# Altium PCB level_converter.PcbDoc
Units mm, origin at the board's own origin, x right, y up, seen from the top; angles counter-clockwise.
Board outline 200.41 x 199.96 mm, 2 copper layers (Top Layer, Bottom Layer); 20 components, 15 nets, 62 pads, 0 vias.
Unrouted connection lines stored in the file: 43.
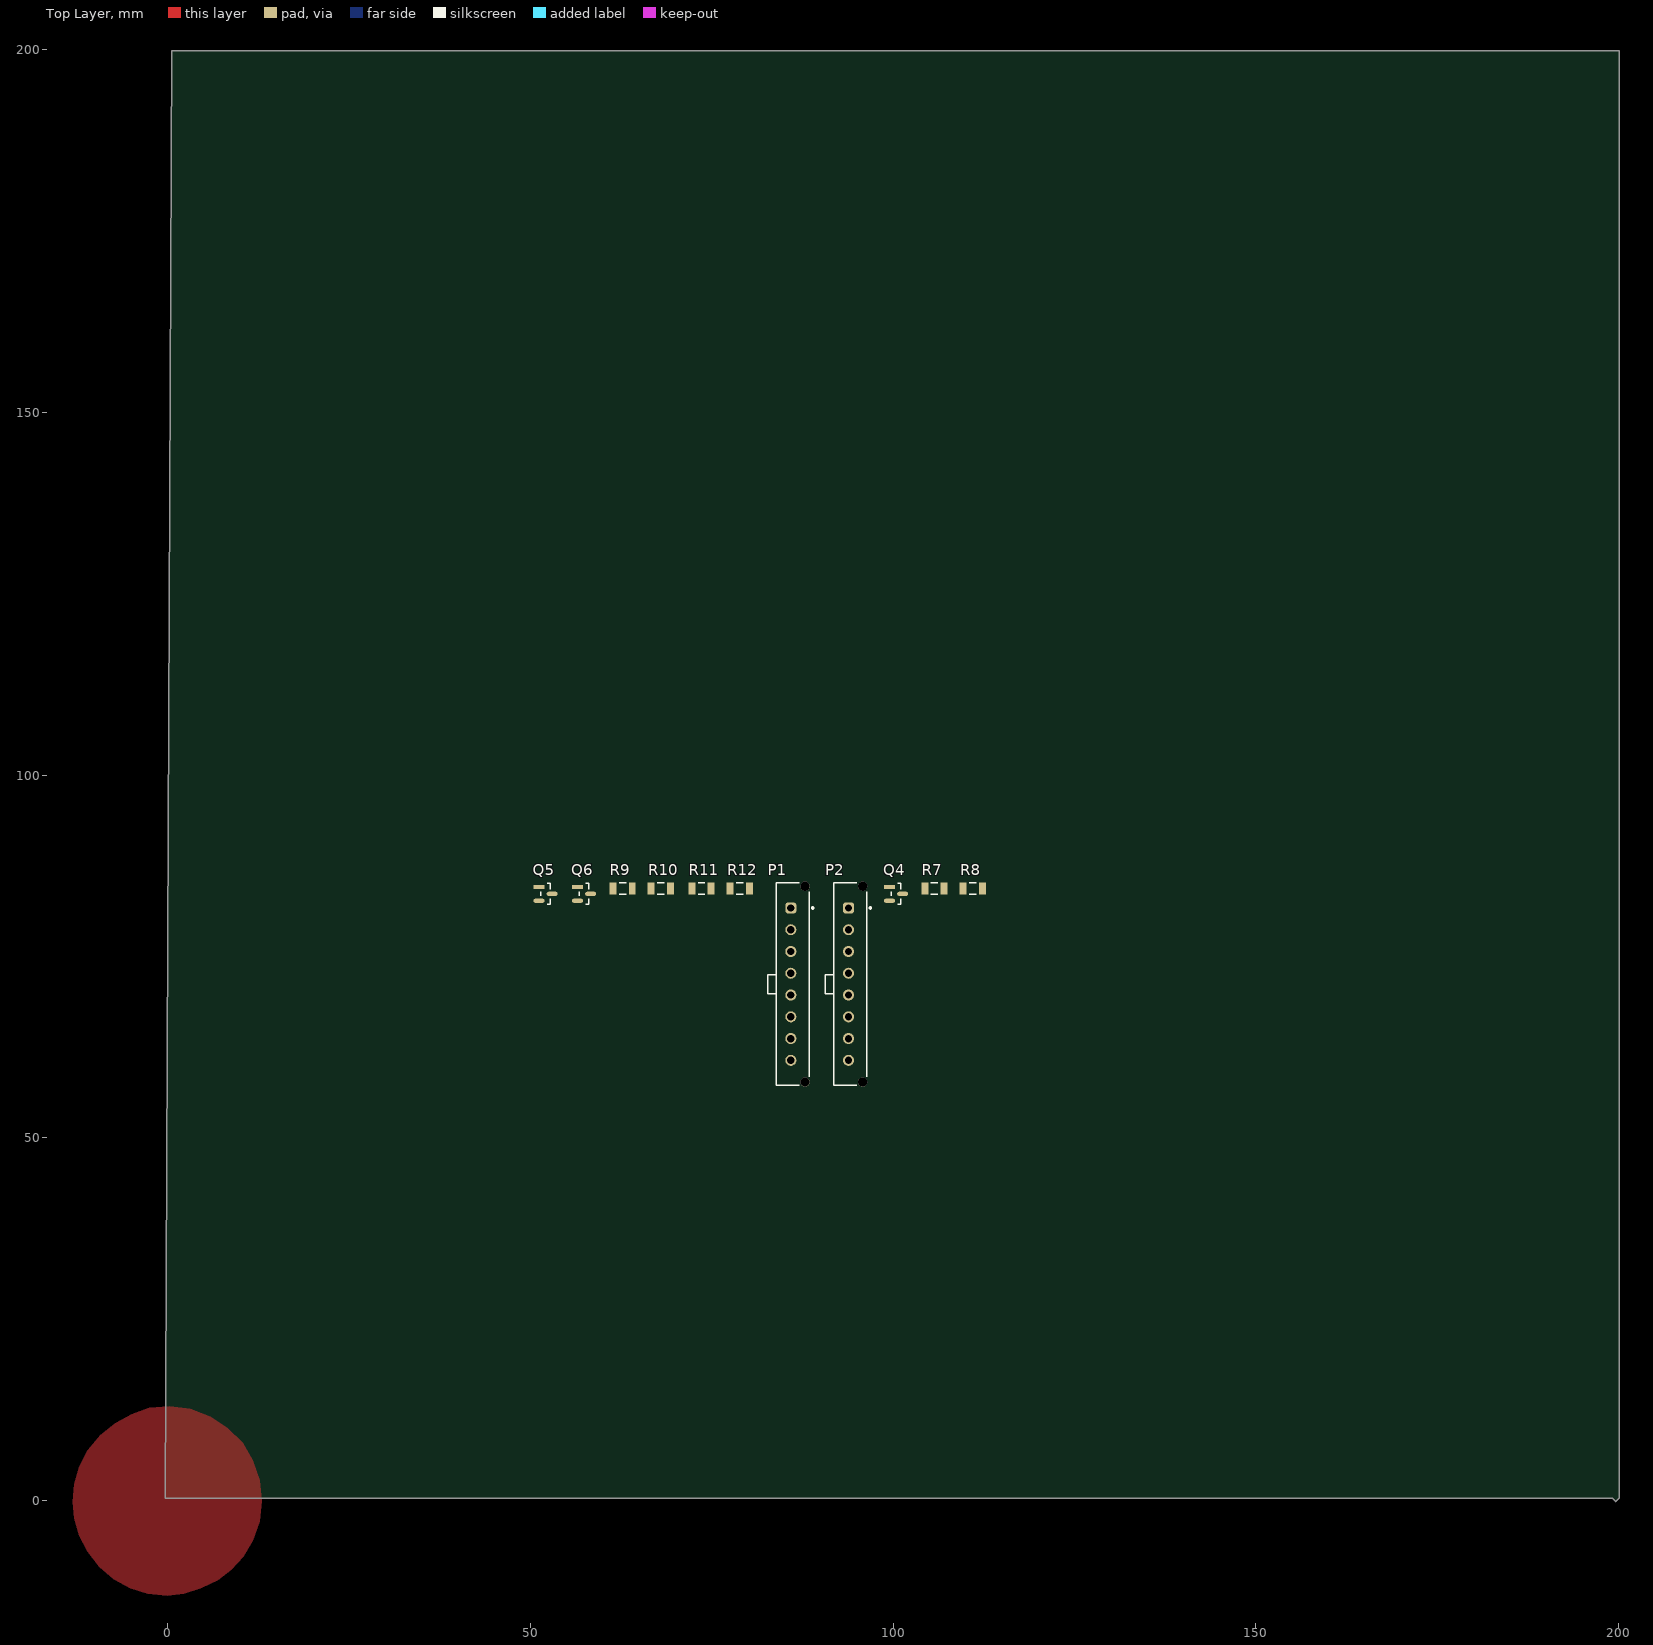
[diagram p0: Top Layer view]
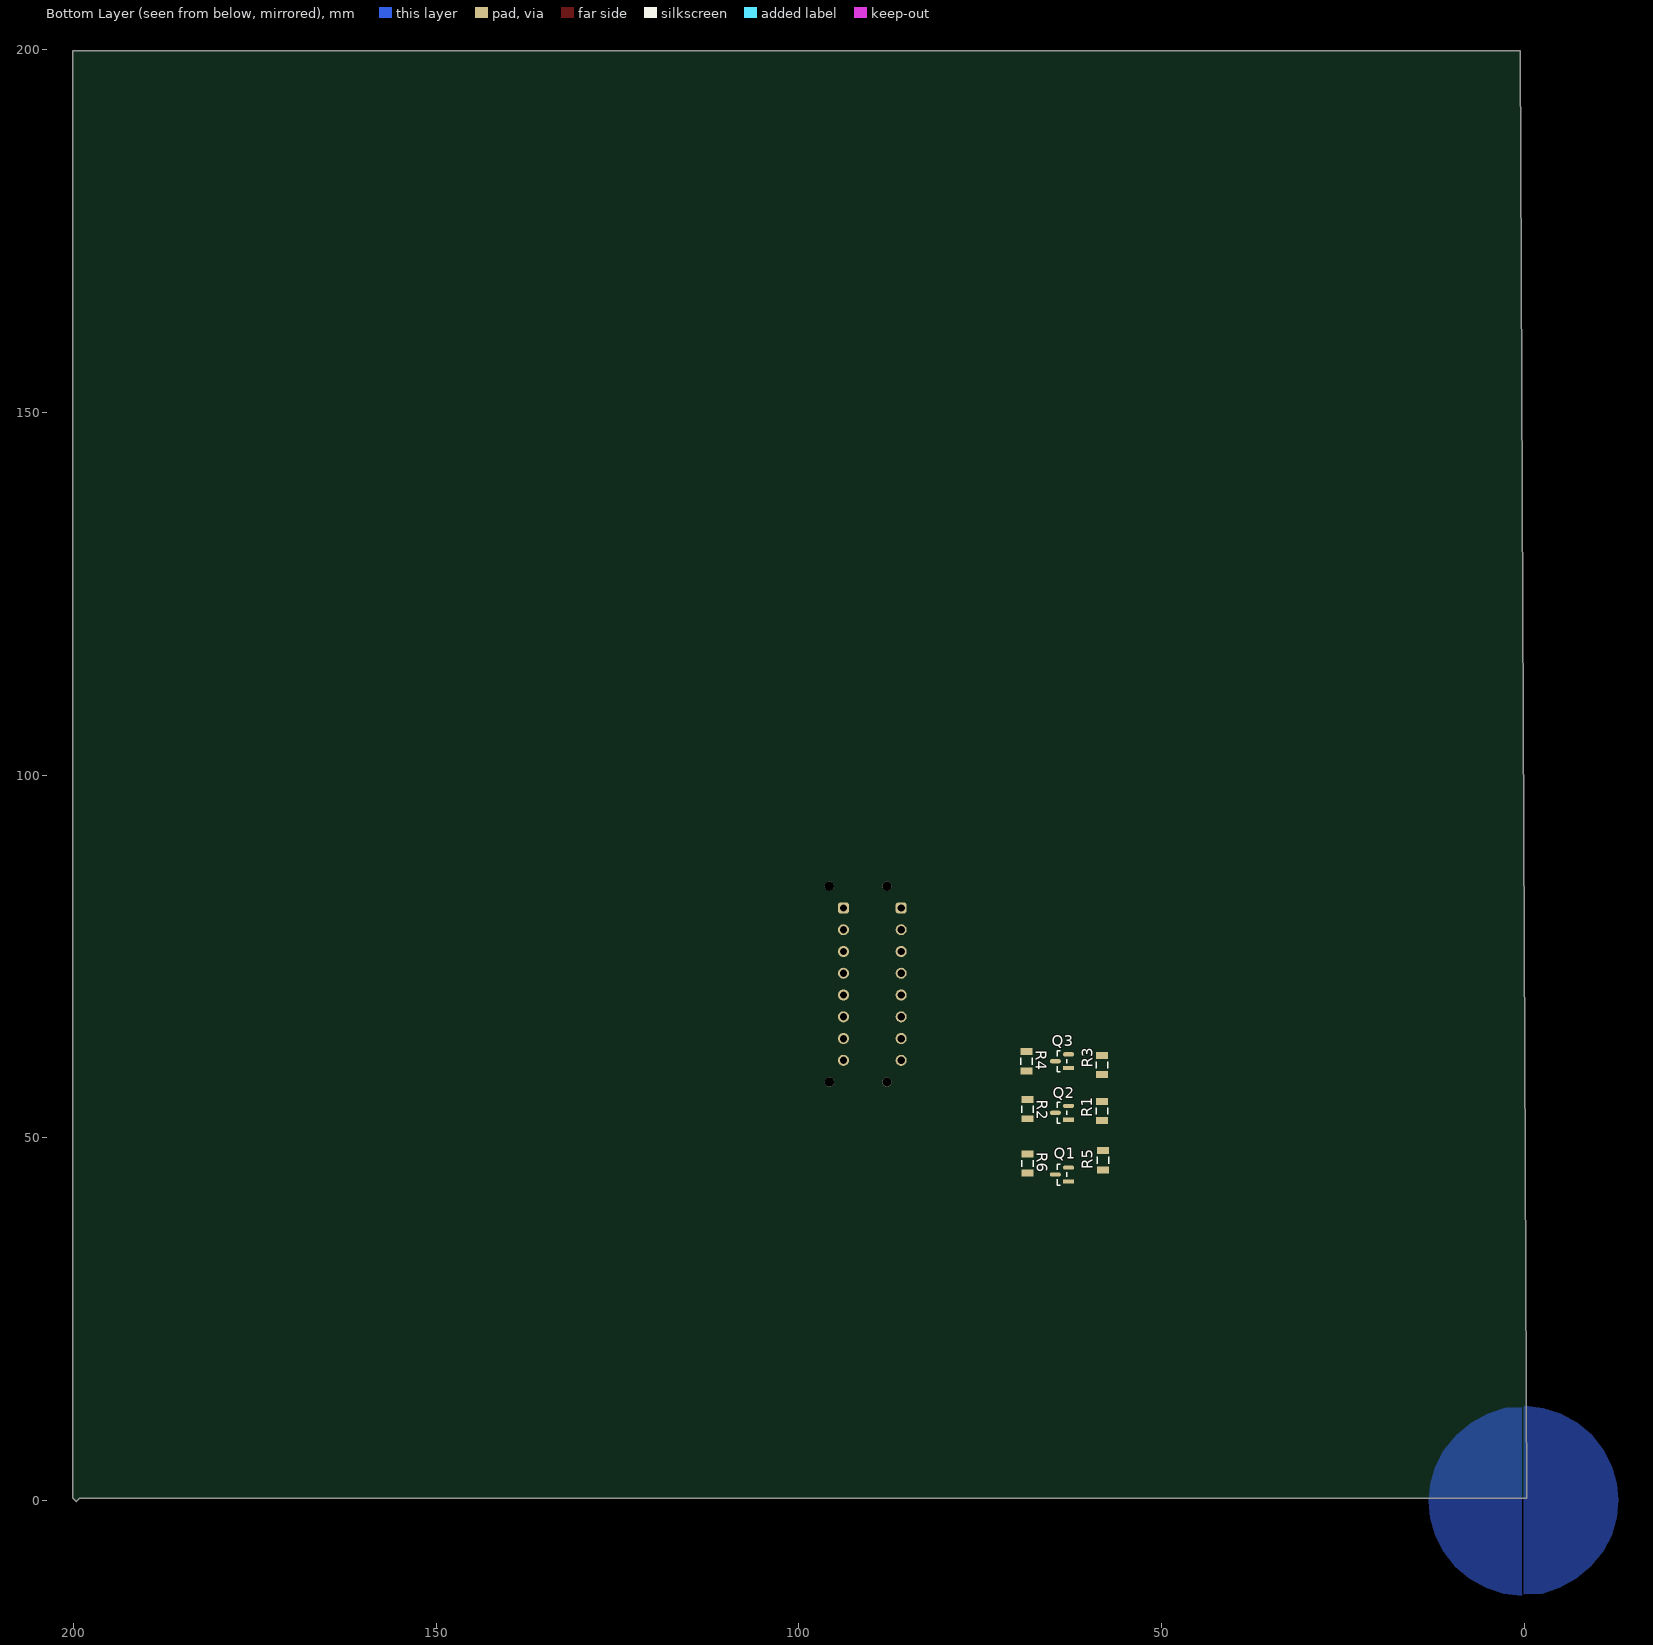
[diagram p1: Bottom Layer view, seen from below]

## Layer stack, top to bottom
Top Solder: solder mask 0.0102, Solder Resist, Dk 3.5
Top Layer: signal copper 0.0356
Dielectric 1: dielectric 0.32, FR-4, Dk 4.8
Bottom Layer: signal copper 0.0356
Bottom Solder: solder mask 0.0102, Solder Resist, Dk 3.5

## Board outline
-0.331,0.3 199.177,0.3 199.629,-0.153 200.081,0.3 200.081,199.807 0.574,199.807

## Design rules (kind name [scope] priority, off if disabled: settings)
Clearance [All] p1: gap=0.254 ignorepadtopadclearanceinfootprint=FALSE
PolygonConnect [All] p1: connectstyle=Direct reliefconductorwidth=0.254 reliefentries=4 polygonreliefangle="90 Angle" airgapwidth=0.254
RoutingVias [All] p1: holewidth=0.711 width=1.27 viastyle="Through Hole" minholewidth=0.711 minwidth=1.27 maxholewidth=0.711 maxwidth=1.27
SolderMaskExpansion [All] p1: expansion=0.102 istentingtop=FALSE
Width [All] p1: maxlimit=0.5 minlimit=0.5 preferedwidth=0.5
30 further rules are at their usual default settings.

## Components (designator, comment, footprint, x,y, rotation, side; value= is the part's Value field where it differs from the comment)
P1 "LOW_VOLTAGE" 66200811122 86.175,71.174 r90 top
P2 "HIGH_VOLTAGE" 66200811122 94.125,71.174 r90 top
Q1 "BSS138" FP-318-08-IPC_B 63.757,44.932 r0 bottom
Q2 "BSS138" FP-318-08-IPC_B 63.757,53.441 r0 bottom
Q3 "BSS138" FP-318-08-IPC_B 63.757,60.553 r0 bottom
Q4 "BSS138" FP-318-08-IPC_B 100.425,83.62 r0 top
Q5 "BSS138" FP-318-08-IPC_B 52.114,83.62 r0 top
Q6 "BSS138" FP-318-08-IPC_B 57.422,83.62 r0 top
R1 "CRCW120610K0FKEA" FP-CRCW1206-e3-IPC_C 58.213,53.695 r270 bottom
R2 "CRCW120610K0FKEA" FP-CRCW1206-e3-IPC_C 68.5,53.949 r90 bottom
R3 "CRCW120610K0FKEA" FP-CRCW1206-e3-IPC_C 58.213,60.024 r270 bottom
R4 "CRCW120610K0FKEA" FP-CRCW1206-e3-IPC_C 68.627,60.553 r270 bottom
R5 "CRCW120610K0FKEA" FP-CRCW1206-e3-IPC_C 58.086,46.89 r270 bottom
R6 "CRCW120610K0FKEA" FP-CRCW1206-e3-IPC_C 68.5,46.456 r90 bottom
R7 "CRCW120610K0FKEA" FP-CRCW1206-e3-IPC_C 105.708,84.332 r0 top
R8 "CRCW120610K0FKEA" FP-CRCW1206-e3-IPC_C 110.991,84.332 r0 top
R9 "CRCW120610K0FKEA" FP-CRCW1206-e3-IPC_C 62.731,84.332 r0 top
R10 "CRCW120610K0FKEA" FP-CRCW1206-e3-IPC_C 67.989,84.332 r0 top
R11 "CRCW120610K0FKEA" FP-CRCW1206-e3-IPC_C 73.602,84.332 r0 top
R12 "CRCW120610K0FKEA" FP-CRCW1206-e3-IPC_C 78.885,84.332 r0 top

## Footprints (in the part's own frame and the unit in brackets; to place one, negate y for a bottom-side part, rotate by r counter-clockwise, add the part's x,y. Pads: shape width x height; smd on the part's side, far side on the other; paste and mask are expansions set on the pad)
66200811122 [mm] "3.00mm Male Single Row Vertical Header, 8p"
  rrect50% 1.52x1.52 hole 1.02: 1(10.5,0.255)
  round 1.52 hole 1.02: 2(7.5,0.255) 3(4.5,0.255) 4(1.5,0.255) 5(-1.5,0.255) 6(-4.5,0.255) 7(-7.5,0.255) 8(-10.5,0.255)
  round 1.27 hole 1.27 unplated: MH1(-13.5,-1.705) MH2(13.5,-1.705)
  silkscreen extent -13.95,-2.88 13.95,3.46, body extent -13.82,-2.19 13.83,3.38, height 9.93
FP-318-08-IPC_B [mm]
  rect 1.524x0.578 smd paste+0 mask+0: 1(-0.91,0.95)
  rrect100% 1.524x0.578 smd paste+0 mask+0: 2(-0.91,-0.95) 3(0.91,0)
  silkscreen extent -0.65,-1.45 0.65,1.45, body extent -1.2,-1.45 1.2,1.45, height 1.11
FP-CRCW1206-e3-IPC_C [mm]
  rect 0.956x1.658 smd paste+0 mask+0: 1(-1.326,0) 2(1.326,0)
  silkscreen extent -0.47,-0.8 0.47,0.8, body extent -1.6,-0.8 1.6,0.8, height 0.6

## Part data
P1 P2: library part CMP-1502-00446-2, Color=Black, Contact Resistance=10mΩ, Current Rating=5A, Insulation Resistance=1GΩ, Max Operating Temperature=105°C, Min Operating Temperature=-40°C, Operating Supply Voltage=250V, Connector Type="Male Pin, Socket", Contact Material=Copper, Contact Plating=Tin, Fastening Type=Ramp, Gender=Male, Height=11mm, Lead Pitch=3mm, Length=27.65mm, Mount="Through Hole", NexarPartId=23024701, Number of Contacts=8, Number of Pins=8, Number of Positions=8, Number of Rows=1, Orientation=Vertical, Pitch=3mm, REACH SVHC=Unknown, RoHS=Compliant, Termination="Kinked Pin", Width=27.65mm
Q1 Q2 Q3 Q4 Q5 Q6: library part CMP-07173-000101-1, "MOSFET N-CH 50V 220MA SOT-23", Case/Package=SOT-23, Continuous Drain Current (ID)=220mA, Drain to Source Breakdown Voltage=50V, Drain to Source Resistance=3.5R, Gate to Source Voltage (Vgs)=20V, Input Capacitance=27pF, Max Operating Temperature=150°C, Max Power Dissipation=360mW, Min Operating Temperature=-55°C, On-State Resistance=6R, Package Quantity=1, Threshold Voltage=1.3V, Contact Plating=Tin, Current Rating=220mA, Drain to Source Voltage (Vdss)=50V, Dual Supply Voltage=50V, Element Configuration=Single, Fall Time=9ns, Height=0.93mm, Lead Free="Lead Free", Length=2.92mm, Mount="Surface Mount", Nominal Vgs=1.3V, Number of Elements=1, Number of Pins=3, Packaging="Tape and Reel", Power Dissipation=360mW, Radiation Hardening=No, Rds On Max=3.5R, REACH SVHC="No SVHC", Rise Time=9ns, Termination=SMD/SMT, Turn-Off Delay Time=20ns, Turn-On Delay Time=2.5ns, Voltage Rating (DC)=50V, Weight=0.03g, Width=1.3mm
R1 R2 R3 R4 R5 R6 R7 R8 R9 R10 R11 R12: library part CMP-2003-04807-2, "RES Thick Film, 10kΩ, 1%, 0.25W, 100ppm/°C, 1206", Case Code (Imperial)=1206, Case Code (Metric)=3216, Max Operating Temperature=155°C, Max Power Dissipation=250mW, Min Operating Temperature=-55°C, Package Quantity=10, Resistance=10kR, Temperature Coefficient=100ppm/°C, Tolerance=1%, Voltage Rating=200V, Case/Package=1206, Composition="Thick Film", Contact Plating=Tin, Depth=1.6mm, Features="Automotive AEC-Q200", Height=0.55mm, Lead Free="Lead Free", Length=3.2mm, Military Standard=Not, Number of Pins=2, Number of Terminations=2, Packaging="Tape and Reel", Power Rating=250mW, Radiation Hardening=No, Termination=SMD/SMT, Voltage Rating (DC)=200V, Weight=0.000353oz, Width=0.063inch, Working Voltage=200V

## Nets (pads, with @x,y where several pads share a name; then routed paths per layer and width w, separated by ;. In a path a pad name is that pad's centre, name@x,y a point inside that pad or via, vN(x,y) a via of type N, cw(c..) or ccw(c..) an arc to the next point about the centre after c; other vN are vias at no path point)
GND: P1.3 P2.3
HV: P2.4 R3.2 R4.2 R6.2 R8.2 R10.2 R12.2
HV1: P2.1 Q1.3 R3.1
HV2: P2.2 Q2.3 R4.1
HV3: P2.5 Q3.3 R6.1
HV4: P2.6 Q4.3 R8.1
HV5: P2.7 Q5.3 R10.1
HV6: P2.8 Q6.3 R12.1
LV: P1.4 Q1.1 Q2.1 Q3.1 Q4.1 Q5.1 Q6.1 R1.2 R2.2 R5.2 R7.2 R9.2 R11.2
LV1: P1.1 Q1.2 R2.1
LV2: P1.2 Q2.2 R1.1
LV3: P1.5 Q3.2 R5.1
LV4: P1.6 Q4.2 R7.1
LV5: P1.7 Q5.2 R9.1
LV6: P1.8 Q6.2 R11.1
pads on no net: P1.MH1 P1.MH2 P2.MH1 P2.MH2

## Polygon pours and split planes (outlines as drawn)
HV on Bottom Layer "HV_L02_P003" (solid, pour order 3): 9.552,-9.123 7.521,-10.799 5.288,-12.036 2.83,-12.82 0.172,-13.123 0.172,12.877 2.674,12.779 5.062,11.926 7.357,10.704 9.403,9.01 11.121,6.941 12.302,4.686 12.97,2.257 13.172,-0.123 12.97,-2.404 12.302,-4.798 11.121,-7.048
LV on Bottom Layer "LV_L02_P002" (solid, pour order 2): -9.288,9.045 -7.257,10.72 -5.024,11.958 -2.566,12.741 0.092,13.045 0.092,-12.955 -2.41,-12.857 -4.798,-12.005 -7.093,-10.783 -9.139,-9.089 -10.857,-7.019 -12.038,-4.765 -12.706,-2.335 -12.908,0.045 -12.706,2.325 -12.038,4.72 -10.857,6.97
no net on Top Layer "NONET_L01_P001" (solid, pour order 1): -9.42,-9.148 -7.389,-10.823 -5.156,-12.061 -2.698,-12.844 -0.04,-13.147 2.239,-12.844 4.553,-12.061 6.928,-11 8.799,-9.569 10.443,-7.742 11.769,-5.521 12.69,-2.824 13,0 12.69,2.824 11.769,5.521 10.352,7.947 8.267,10.033 5.991,11.537 3.135,12.616 0.304,12.996 -2.542,12.754 -4.93,11.902 -7.225,10.68 -9.271,8.986 -10.989,6.917 -12.17,4.662 -12.838,2.233 -13.04,-0.147 -12.838,-2.428 -12.17,-4.822 -10.989,-7.073